# Altium PCB transmit.PcbDoc
Units mil, origin at the board's own origin, x right, y up, seen from the top; angles counter-clockwise.
Board outline 3897.64 x 3897.64 mil, 2 copper layers (Top Layer, Bottom Layer); 44 components, 2 nets, 92 pads, 0 vias.
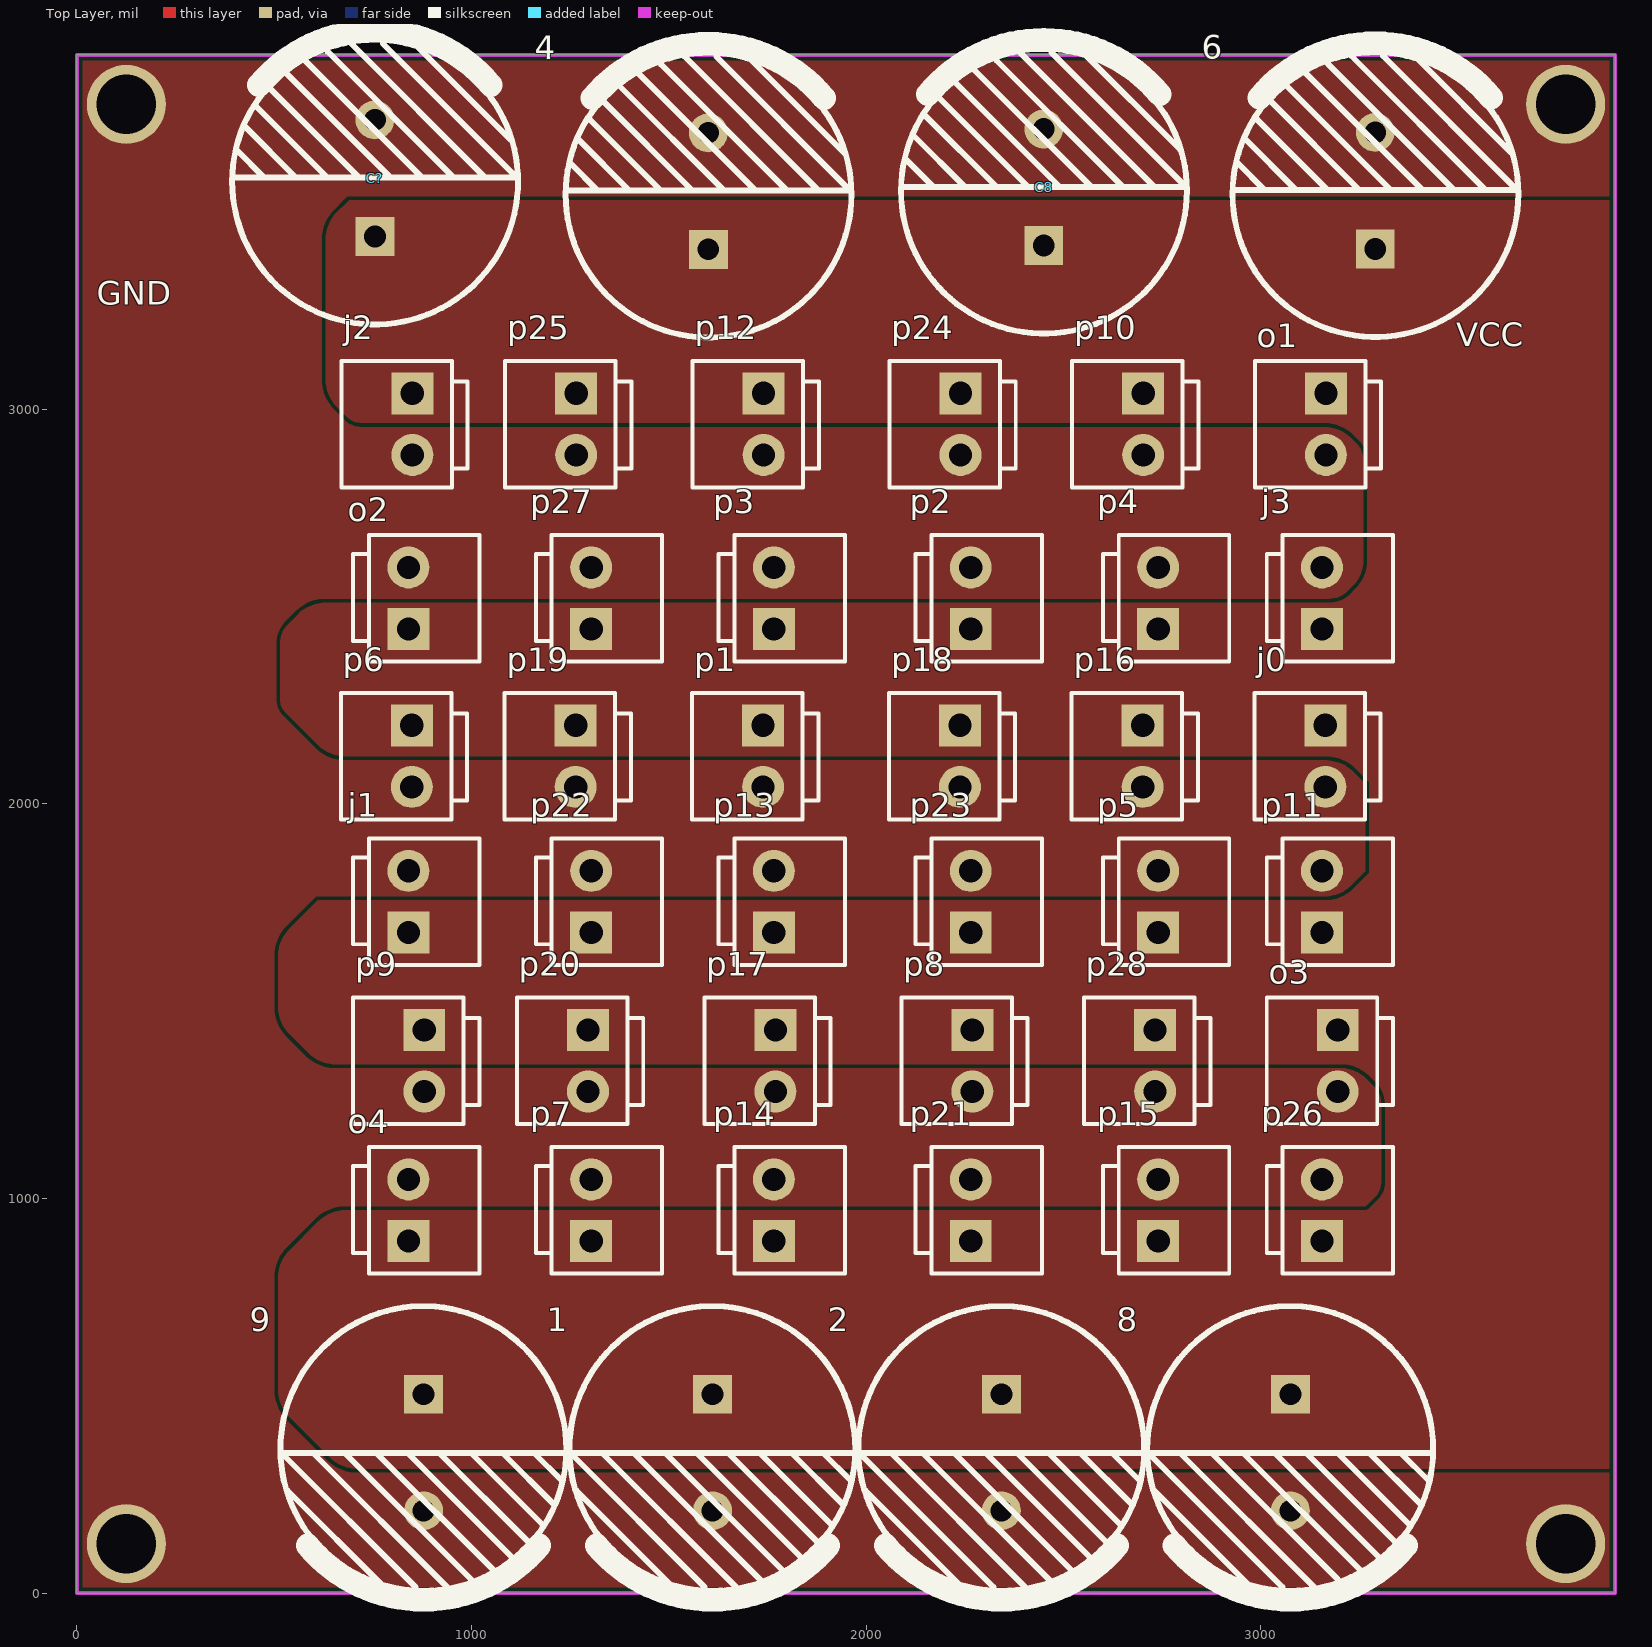
[diagram p0: Top Layer view]
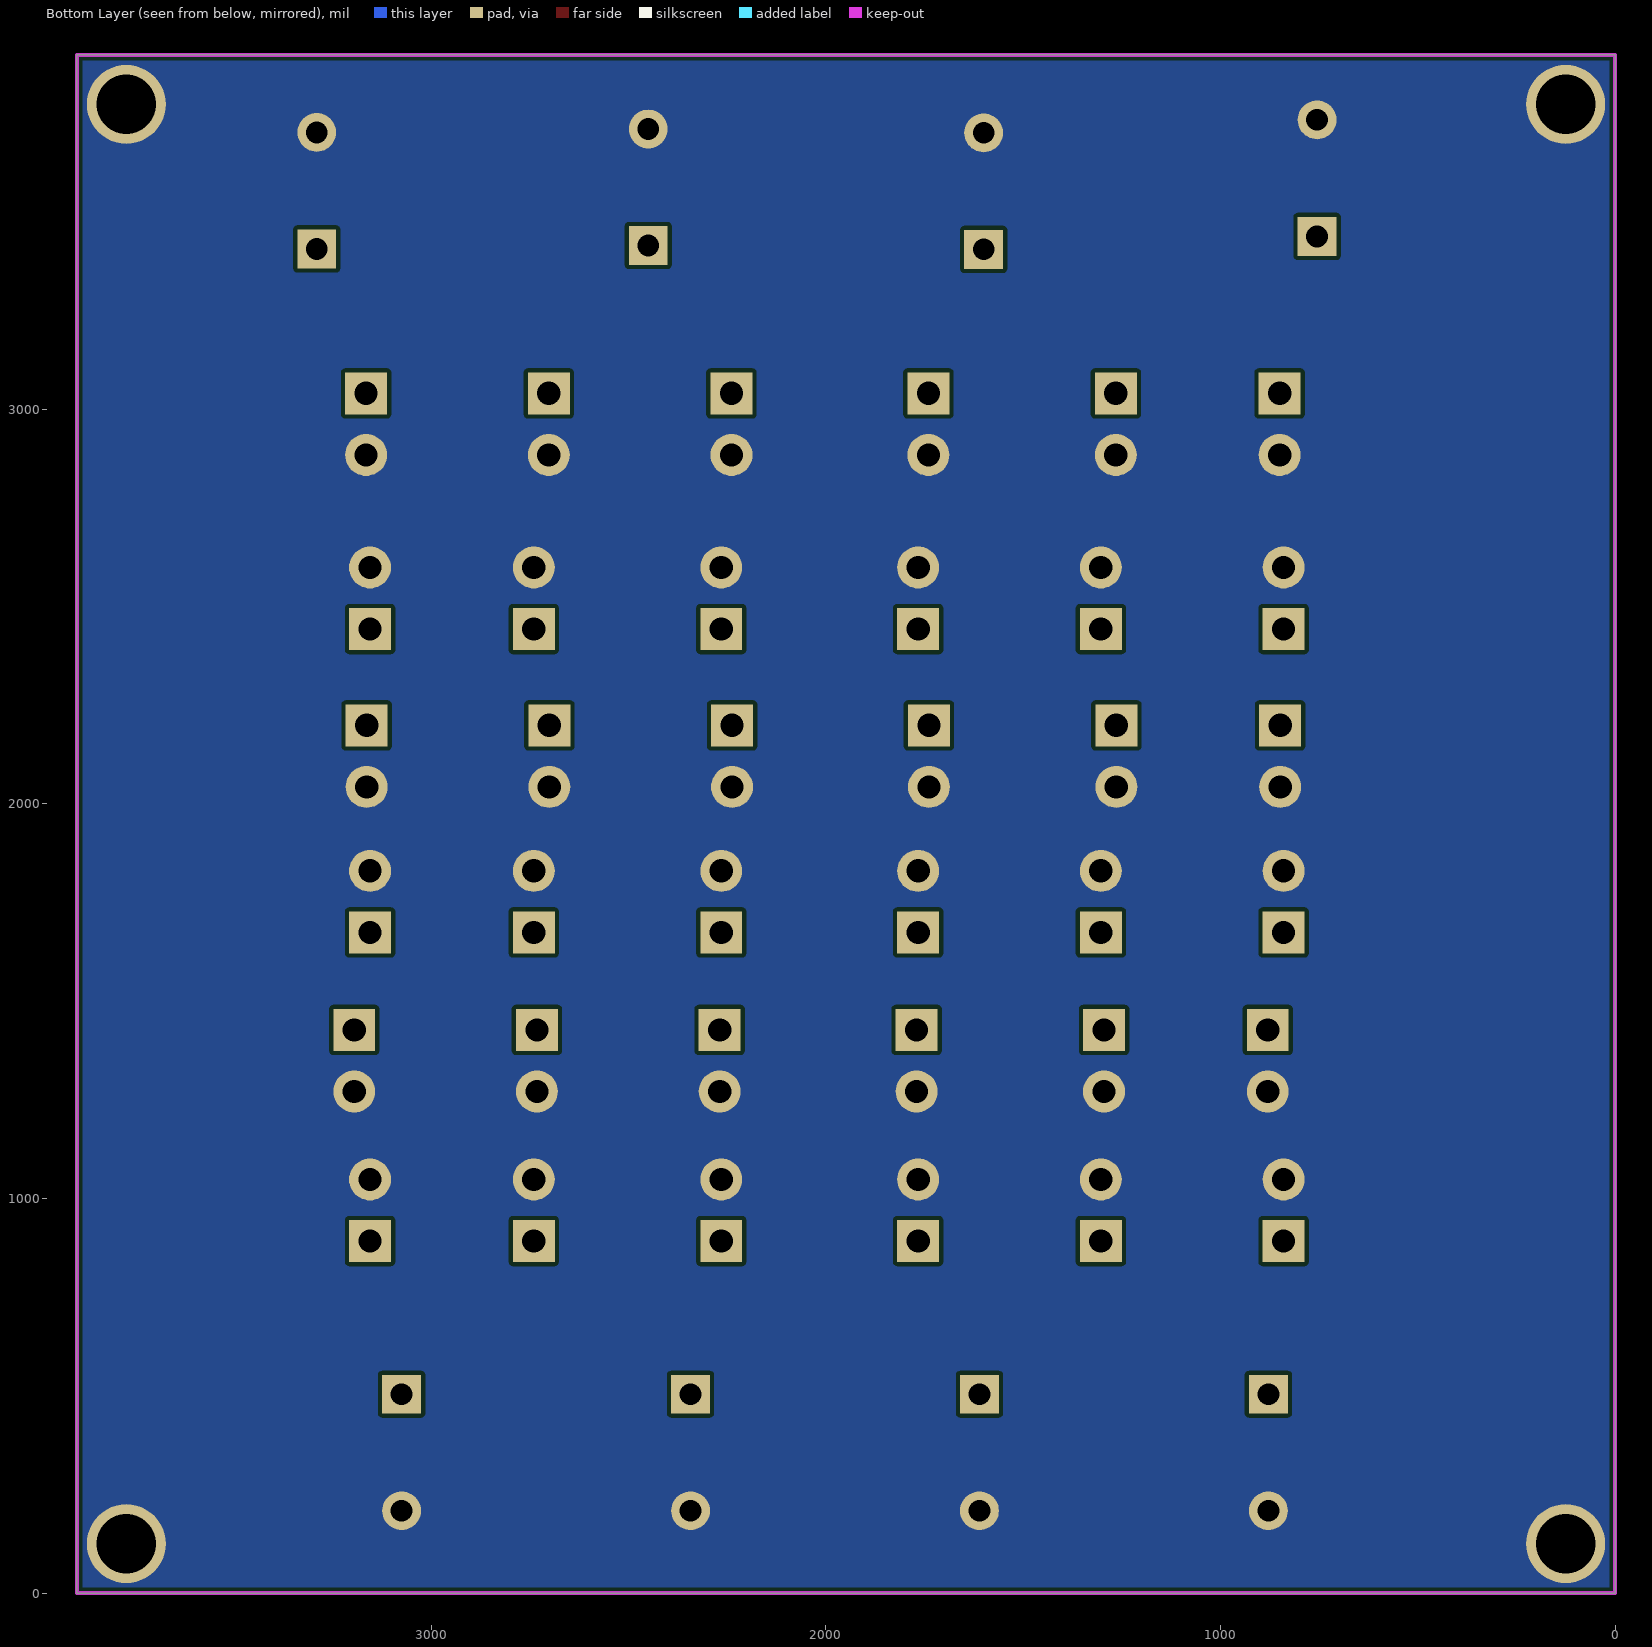
[diagram p1: Bottom Layer view, seen from below]

## Layer stack, top to bottom
Top Solder: solder mask 0.4, Solder Resist, Dk 3.5
Top Layer: signal copper 1.4
Dielectric 1: dielectric 12.6, FR-4, Dk 4.8
Bottom Layer: signal copper 1.4
Bottom Solder: solder mask 0.4, Solder Resist, Dk 3.5

## Board outline
0,0 0,3897.64 3897.64,3897.64 3897.64,0

## Design rules (kind name [scope] priority, off if disabled: settings)
Clearance [All] p1: gap=10 ignorepadtopadclearanceinfootprint=FALSE except(0: Arc-Hole Track-Hole SMDPad-Hole THPad-Hole Via-Hole Fill-Hole Poly-Hole Region-Hole Text-Hole)
PlaneConnect [All] p1: planeconnectstyle=Direct reliefexpansion=20 reliefentries=4 reliefconductorwidth=10 reliefairgap=10
PolygonConnect [All] p1: connectstyle=Direct reliefconductorwidth=10 reliefentries=4 polygonreliefangle="90 Angle" airgapwidth=10
RoutingVias [All] p1: holewidth=28 width=50 viastyle="Through Hole" minholewidth=28 minwidth=50 maxholewidth=28 maxwidth=50
SolderMaskExpansion [All] p1: expansion=4
Width [All] p1: maxlimit=10 minlimit=10 preferedwidth=10
29 further rules are at their usual default settings.

## Components (designator, comment, footprint, x,y, rotation, side; value= is the part's Value field where it differs from the comment)
1 "6pF" "CAP 7.5*18*35.5 - GD" 1610.56,355 r270 top
2 "6pF" "CAP 7.5*18*35.5 - GD" 2342.78,355 r270 top
4 "6pF" "CAP 7.5*18*35.5 - GD" 1600,3553.82 r90 top
6 "6pF" "CAP 7.5*18*35.5 - GD" 3290,3555 r90 top
8 "6pF" "CAP 7.5*18*35.5 - GD" 3075,355 r270 top
9 "6pF" "CAP 7.5*18*35.5 - GD" 878.33,355 r270 top
C8 "6pF" "CAP 7.5*18*35.5 - GD" 2450,3563.54 r90 top
C? "6pF" "CAP 7.5*18*35.5 - GD" 755,3586.71 r90 top
j0 "3.96" 3.96 3163.62,2120.81 r270 top
j1 "3.96" 3.96 840,1752 r90 top
j2 "3.96" 3.96 850,2962.05 r270 top
j3 "3.96" 3.96 3155,2520.83 r90 top
o1 "3.96" 3.96 3165,2962.05 r270 top
o2 "3.96" 3.96 840,2520.83 r90 top
o3 "3.96" 3.96 3195,1349 r270 top
o4 "3.96" 3.96 840,970 r90 top
p1 "3.96" 3.96 1738.62,2120.81 r270 top
p2 "3.96" 3.96 2265,2520.83 r90 top
p3 "3.96" 3.96 1766,2520.83 r90 top
p4 "3.96" 3.96 2740,2520.83 r90 top
p5 "3.96" 3.96 2740,1752 r90 top
p6 "3.96" 3.96 848.62,2120.81 r270 top
p7 "3.96" 3.96 1303,970 r90 top
p8 "3.96" 3.96 2269,1349 r270 top
p9 "3.96" 3.96 880,1349 r270 top
p10 "3.96" 3.96 2702,2962.05 r270 top
p11 "3.96" 3.96 3155,1752 r90 top
p12 "3.96" 3.96 1740,2962.05 r270 top
p13 "3.96" 3.96 1766,1752 r90 top
p14 "3.96" 3.96 1766,970 r90 top
p15 "3.96" 3.96 2740,970 r90 top
p16 "3.96" 3.96 2700.62,2120.81 r270 top
p17 "3.96" 3.96 1770,1349 r270 top
p18 "3.96" 3.96 2237.62,2120.81 r270 top
p19 "3.96" 3.96 1263.62,2120.81 r270 top
p20 "3.96" 3.96 1295,1349 r270 top
p21 "3.96" 3.96 2265,970 r90 top
p22 "3.96" 3.96 1303,1752 r90 top
p23 "3.96" 3.96 2265,1752 r90 top
p24 "3.96" 3.96 2239,2962.05 r270 top
p25 "3.96" 3.96 1265,2962.05 r270 top
p26 "3.96" 3.96 3155,970 r90 top
p27 "3.96" 3.96 1303,2520.83 r90 top
p28 "3.96" 3.96 2732,1349 r270 top

## Footprints (in the part's own frame and the unit in brackets; to place one, negate y for a bottom-side part, rotate by r counter-clockwise, add the part's x,y. Pads: shape width x height; smd on the part's side, far side on the other; paste and mask are expansions set on the pad)
3.96 [mm] "接插件，25V/5A"
  rect 2.7x2.7 hole 1.5: 1(-1.98,0)
  round 2.7 hole 1.5: 2(1.982,0)
  silkscreen extent -4.06,-4.57 4.07,3.56, body extent -3.98,-4.4 4.03,4.16, height 10.5
"CAP 7.5*18*35.5 - GD" [mm] "脚距7.5mm直径18mm高度35.5mm"
  rect 2.5x2.5 hole 1.4: 1(-3.78,0)
  round 2.5 hole 1.4: 2(3.72,0)
  silkscreen extent -9.44,-9.21 9.45,9.19, body extent -8.99,-8.99 9.02,9, height 35.56

## Part data
1 2 4 6 8 9 C8 C?: library part C, "Capacitor"

## Free pads (board coordinates)
  round 200 hole 150 unplated: 2(125,125) 2(125,3772.64) 2(3772.64,125) 2(3772.64,3772.64)

## Nets (pads, with @x,y where several pads share a name; then routed paths per layer and width w, separated by ;. In a path a pad name is that pad's centre, name@x,y a point inside that pad or via, vN(x,y) a via of type N, cw(c..) or ccw(c..) an arc to the next point about the centre after c; other vN are vias at no path point)
GND: 1.2 2.2 4.2 6.2 8.2 9.2 C8.2 C?.2 j0.2 j1.2 j2.2 j3.2 o1.2 o2.2 o3.2 o4.2 p1.2 p2.2 p3.2 p4.2 p5.2 p6.2 p7.2 p8.2 p9.2 p10.2 p11.2 p12.2 p13.2 p14.2 p15.2 p16.2 p17.2 p18.2 p19.2 p20.2 p21.2 p22.2 p23.2 p24.2 p25.2 p26.2 p27.2 p28.2 pad.2
VCC: 1.1 2.1 4.1 6.1 8.1 9.1 C8.1 C?.1 j0.1 j1.1 j2.1 j3.1 o1.1 o2.1 o3.1 o4.1 p1.1 p2.1 p3.1 p4.1 p5.1 p6.1 p7.1 p8.1 p9.1 p10.1 p11.1 p12.1 p13.1 p14.1 p15.1 p16.1 p17.1 p18.1 p19.1 p20.1 p21.1 p22.1 p23.1 p24.1 p25.1 p26.1 p27.1 p28.1

## Polygon pours and split planes (outlines as drawn)
GND on Top Layer "Top Layer-No Net" (solid, pour order 4): 0,3897.64 3897.64,3897.64 3897.64,0 0,0
VCC on Top Layer "Top Layer-No Net" (solid, pour order 2): 3882.34,3530 690,3530 659.29,3499.29 ccw(c730,3428.58) 630,3428.58 630,3076.42 ccw(c730,3076.42) 659.29,3005.71 685,2980 ccw(c721.21,3016.21) 721.21,2965 3163.58,2965 cw(c3163.58,2865) 3234.29,2935.71 3250,2920 cw(c3201.72,2871.72) 3270,2871.72 3270,2616.42 cw(c3170,2616.42) 3240.71,2545.71 3225,2530 cw(c3176.72,2578.28) 3176.72,2510 631.42,2510 ccw(c631.42,2410) 560.71,2480.71 536.21,2456.21 ccw(c587.43,2405) 515,2405 515,2266.21 ccw(c566.21,2266.21) 530,2230 610.71,2149.29 ccw(c681.42,2220) 681.42,2120 3168.58,2120 cw(c3168.58,2020) 3239.29,2090.71 3275,2055 3275,1825 3234.29,1784.29 cw(c3163.58,1855) 3163.58,1755 610,1755 539.29,1684.29 ccw(c610,1613.58) 510,1613.58 510,1486.42 ccw(c610,1486.42) 539.29,1415.71 585.71,1369.29 ccw(c656.42,1440) 656.42,1340 3203.58,1340 cw(c3203.58,1240) 3274.29,1310.71 3295,1290 cw(c3246.72,1241.72) 3315,1241.72 3315,1040 cw(c3254.64,1040) 3297.32,997.32 3275,975 cw(c3262.93,987.07) 3262.93,970 681.42,970 ccw(c681.42,870) 610.71,940.71 539.29,869.29 ccw(c610,798.58) 510,798.58 510,516.06 ccw(c610,516.06) 539.29,445.35 640.35,344.29 ccw(c711.06,415) 711.06,315 3910,315
GND on Bottom Layer "Top Layer-No Net" (solid, pour order 6): 0,3897.64 3897.64,3897.64 3897.64,0 0,0

## Keep-outs
Keep-Out Layer:
  lines w10: -5172.36,4232.64 -4837.36,3897.64 ; 8735,0 9070,-335 ; 0,0 3897.64,0 3897.64,3897.64 0,3897.64 0,0

## Silkscreen, mask and mechanical layers (free items; w line width, h text height)
Top Overlay:
  text "GND" at 50,3265 h60
  text "VCC" at 3495,3160 h60
Top Solder:
  rectangle: 0,470 460,3180
  rectangle: 3375,690 3895,3120